# Altium PCB LimeSDR-Mini_2v5_Rounded.PcbDoc (part 4 of 7)
Units mm, origin at the board's own origin, x right, y up, seen from the top; angles counter-clockwise.
Board outline 69 x 31.37 mm, 8 copper layers (Top, L2, L3, L4, L5, L6, L7, Bottom), stack 1.555 mm thick; 439 components, 294 nets, 1986 pads, 831 vias.
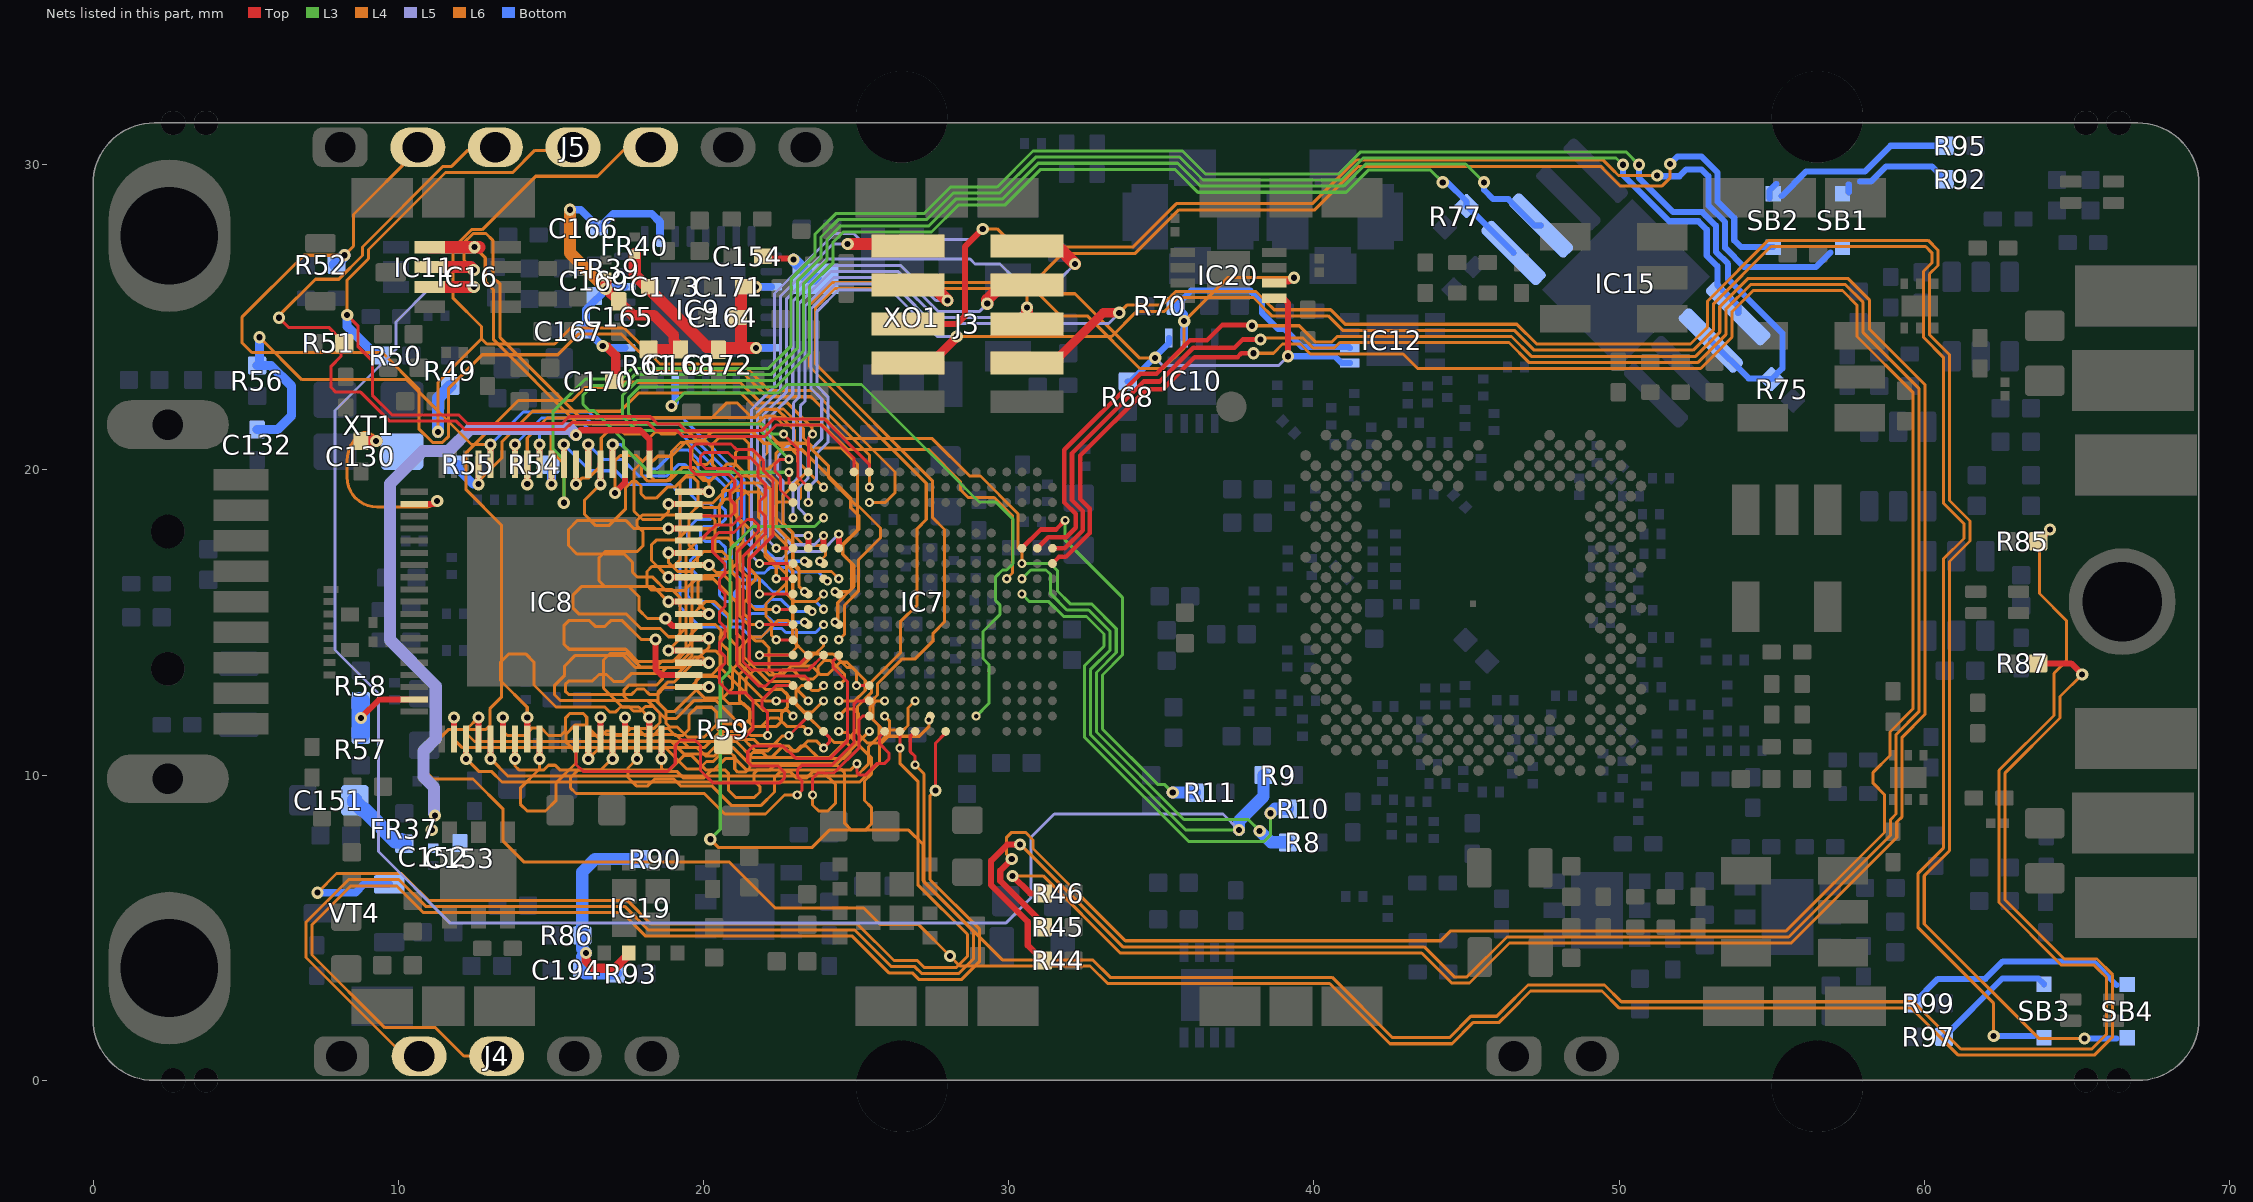
[diagram p9: the nets of this part, all layers, seen from the top]

## Part data (continued)
SB1 SB2 SB3 SB4: library part SOLDER_BRIDGE_TRIANGULAR, "Can be shorted out using solder paste or 0402-1206 resistor", Manufacturer=Yageo, Manufacturer Part Number 1=RC0402JR-070RL, Operating Temperature="-55°C ~ 155°C", Package / Case="0402 (1005 Metric)", Power (Watts)="0.063W, 1/16W", Resistance (Ohms)=0.0, Supplier Device Package=0402, Supplier Part Number 1=311-0.0JRTR-ND, Temperature Coefficient=-, Tolerance=Jumper, Category=Resistors, Composition="Thick Film", Features="Moisture Resistant", Height="0.016\" (0.40mm)", Number of Terminations=2, Packaging="Tape & Reel (TR)", Part Description="RES SMD 0.0OHM JUMPER 1/16W 0402", RoHS="RoHS Compliant", Size / Dimension="0.039\" L x 0.020\" W (1.00mm x 0.50mm)", Supplier 1=Digi-Key
T1 T2 T3 T4: library part TC1-1-13M+, Manufacturer=Minicircuits, Manufacturer Part Number 1=TC1-1-13M-45+, Part Description="RF balun; 1:1 ratio; 3 dB bandwidth: 0.3 MHz to 3.5 GHz; 3.8mm x 3.8mm", Supplier 1=Minicircuits, Supplier Part Number 1=TC1-1-13M-45+
VT1 VT2 VT3: library part ZVN4525E6_NMOS, Case/Package=SOT-23, Continuous Drain Current (ID)=230mA, Drain-source On Resistance-Max=8.5R, Drain to Source Breakdown Voltage=250V, Drain to Source Resistance=9.5R, Gate to Source Voltage (Vgs)=40V, Input Capacitance=72pF, Manufacturer="Diodes Zetex", Max Operating Temperature=150°C, Max Power Dissipation=1.1W, Min Operating Temperature=-55°C, Package Quantity=3000, Supplier Part Number 1=31-ZVN4525E6TACT-ND, Threshold Voltage=1.4V, ComponentLink1Description=https://datasheet.ciiva.com/935/zvn4525e6-935664.pdf?src-supplier=Digi-Key, ComponentLink1URL=https://datasheet.ciiva.com/935/zvn4525e6-935664.pdf?src-supplier=Digi-Key, ComponentLink2Description=https://datasheet.ciiva.com/25625/0900766b8104e683-25625123.pdf?src-supplier=RSComponents, ComponentLink2URL=https://datasheet.ciiva.com/25625/0900766b8104e683-25625123.pdf?src-supplier=RSComponents, ComponentLink3Description=https://datasheet.ciiva.com/16504/zvn4525e6-16504983.pdf?src-supplier=Future+Electronics, ComponentLink3URL=https://datasheet.ciiva.com/16504/zvn4525e6-16504983.pdf?src-supplier=Future+Electronics, Current Rating=230mA, Drain to Source Voltage (Vdss)=250V, Element Configuration=Single, Fall Time=1.7ns, Height=1.3mm, Lead Free="Lead Free", Length=3.1mm, Manufacturer Part Number 1=ZVN4525E6TA, Mount="Surface Mount", Nominal Vgs=1.4V, Number of Channels=1, Number of Elements=1, Number of Pins=6, On-State Resistance=8.5R, Packaging="Tape and Reel", Part Description="N-Channel 250 V 230mA (Ta) 1.1W (Ta) Surface Mount SOT-23-6", Polarity=N-CHANNEL, Power Dissipation=1.1W, Pricing 1="1=0,91000, 10=0,81200, 100=0,63300, 500=0,52292, 1000=0,41283 (USD)", Radiation Hardening=No, Rds On Max=8.5R, REACH SVHC="No SVHC", Rise Time=1.7ns, RoHS=Yes, RoHS Compliant=Yes, Series=-, Stock 1=1399, Supplier 1=Digi-Key, Turn-Off Delay Time=11.4ns, Turn-On Delay Time=1.25ns, Voltage Rating (DC)=250V, Weight=0.000529oz, Width=1.8mm
  VT1 VT2: Assembly Info=NF
VT4: library part NDS331N, "NDS331N", Current - Continuous Drain (Id) @ 25°C="6.3A (Ta)", Drive Voltage (Max Rds On,  Min Rds On)="2.5V, 4.5V", Input Capacitance (Ciss) (Max) @ Vds="700pF @ 16V", Manufacturer="Infineon Technologies", Operating Temperature="-55°C ~ 150°C (TJ)", Package / Case="TO-236-3, SC-59, SOT-23-3", Power Dissipation (Max)="1.3W (Ta)", Supplier Device Package=Micro3™/SOT-23, Supplier Part Number 1=IRLML6244TRPBFTR-ND, Category="Discrete Semiconductor Products", ComponentLink1Description=https://www.infineon.com/dgdl/irlml6244pbf.pdf?fileId=5546d462533600a4015356686fed261f, ComponentLink1URL=https://www.infineon.com/dgdl/irlml6244pbf.pdf?fileId=5546d462533600a4015356686fed261f, FET Feature=-, FET Type=N-Channel, Gate Charge (Qg) (Max) @ Vgs="8.9nC @ 4.5V", Manufacturer Part Number 1=IRLML6244TRPBF, Mounting Type="Surface Mount", Packaging="Tape & Reel (TR)", Part Description="N-Channel 20V 6.3A (Ta) 1.3W (Ta) Surface Mount Micro3™/SOT-23", Part Status=Active, Pricing 1="3000=0.09979 (USD)", Rds On (Max) @ Id, Vgs="21 mOhm @ 6.3A, 4.5V", RoHS="RoHS Compliant", Stock 1=21000, Supplier 1=Digi-Key, Technology="MOSFET (Metal Oxide)", Vgs (Max)=±12V, Vgs(th) (Max) @ Id="1.1V @ 10µA"
XO1: library part T604-040.0M_VCTCXO_ConnorWinfield, Case/Package=SMD/SMT, Frequency=40MHz, Frequency Stability=0.28ppm, Load Capacitance=15pF, Manufacturer=Connor-Winfield, Max Operating Temperature=85°C, Max Supply Current=6mA, Max Supply Voltage=3.465V, Min Operating Temperature=-40°C, Min Supply Voltage=3.135V, Nominal Supply Voltage (DC)=3.3V, Supplier Part Number 1=CW776CT-ND, ComponentLink1Description=https://datasheet.octopart.com:443/T604-040.0M-Connor-Winfield-datasheet-180230288.pdf?src-supplier=IHS, ComponentLink1URL=https://datasheet.octopart.com:443/T604-040.0M-Connor-Winfield-datasheet-180230288.pdf?src-supplier=IHS, Fall Time=8ns, Height=2.3876mm, Introduction Date=2008-05-23, Length=7.0104mm, Lifecycle Status=Production, Manufacturer Part Number 1=T604-040.0M, Mount="Surface Mount", Number of Pins=10, Number of Terminals=10, Output Type=LVCMOS, Packaging="Cut Tape (CT)", Part Description="40 MHz VCTCXO LVCMOS Oscillator 3.3V Enable/Disable 10-SMD, No Lead", Pricing 1="1=30,65, 10=27,54 (USD)", REACH SVHC=Unaffected, Rise Time=8ns, RoHS=Compliant, Stock 1=73, Supplier 1=DigiKey, Width=5.0038mm
XT1: library part CRYSTAL_19M2, "Oscillator Crystal 25 MHz", ESR (Equivalent Series Resistance)="50 Ohm", Frequency Stability=±20ppm, Frequency Tolerance=±10ppm, Load Capacitance=8pF, Manufacturer="AVX Corp/Kyocera Corp", Manufacturer Part Number 1=CX3225SB30000D0FPLCC, Operating Mode=Fundamental, Operating Temperature="-40°C ~ 85°C", Package / Case="4-SMD, No Lead (DFN, LCC)", Ratings=-, Supplier Part Number 1=1253-1368-1-ND, Category="Crystals and Oscillators", Frequency=30MHz, Height="0.024\" (0.60mm)", Mounting Type="Surface Mount", Packaging="Cut Tape (CT)", Part Description="30MHz ±10ppm Crystal 8pF 50 Ohm -40°C ~ 85°C Surface Mount 4-SMD, No Lead (DFN, LCC)", RoHS="RoHS Compliant", Size / Dimension="0.126\" L x 0.098\" W (3.20mm x 2.50mm)", Supplier 1=Digi-Key, Type="MHz Crystal"

## Free pads (board coordinates)
  round 0.8 hole 0.8 unplated mask+0.05: 0(2.625,31.37) 0(2.625,0) 0(3.7,31.37) 0(3.7,0) 0(65.3,0) 0(65.3,31.37) 0(66.375,0) 0(66.375,31.37)
  round 3 hole 3 unplated mask+0.05: 0(26.5,-0.2) 0(26.5,31.57) 0(56.5,-0.2) 0(56.5,31.57)
  oval 4x5 hole 3.2 slot 4.3 at 90 deg mask+0.05: 2(2.5,3.68) 2(2.5,27.68)
  round 3.5 hole 2.6 mask+0.05: 2(66.486,15.685)

## Via types
v1: diameter 0.4, hole 0.2, Top to Bottom, tented both sides, 554 vias
v2: diameter 0.3, hole 0.15, Top to Bottom, tented both sides, 160 vias
v3: diameter 0.35, hole 0.2, Top to Bottom, tented both sides, 88 vias
v4: diameter 0.5, hole 0.2, Top to Bottom, tented bottom, 25 vias
v5: diameter 0.5, hole 0.2, Top to Bottom, tented both sides, 4 vias

## Nets (pads, with @x,y where several pads share a name; then routed paths per layer and width w, separated by ;. In a path a pad name is that pad's centre, name@x,y a point inside that pad or via, vN(x,y) a via of type N, cw(c..) or ccw(c..) an arc to the next point about the centre after c; other vN are vias at no path point)
+1.8V_DIG_LMK: C164.2 C171.2 C172.2 C173.2 FR40.2 IC9.19 IC9.23 | length 9.2
  Top w0.4: FR40.2@17.75,27.07 17.75,26.395 18.172,25.972 20.105,24.04 20.44,24.04 20.49,23.99 C172.2@20.49,23.95 ; C172.2@20.49,23.94 C172.2@20.49,23.95 ; v1(21.725,24) 21.26,24 ; v1(21.725,26) C171.2@21.325,26 21.225,25.9 21.225,25 21.225,24.035 21.26,24 ; C172.2@20.49,23.95 20.54,24 21.26,24
  Bottom w0.25: v1(21.725,24) IC9.23@22.225,24 ; v1(21.725,26) IC9.19@22.225,26
+3.3V_DIG_LMK: C165.2 C166.2 C167.2 C168.2 C169.2 C170.2 FR39.2 IC9.2 IC9.6 IC9.10 R61.1 | length 17
  Top w0.3: v1(16.7,24.06) 16.719,24.041 16.831,24.041 17.125,23.746 C170.2@17.125,22.9
  Top w0.35: FR39.2@16.808,26.217 16.808,25.942 C165.2@17.225,25.525 17.675,25.075 18.372,25.075 19.022,24.425 19.022,24.228 19.25,24 C168.2@19.25,23.95 R61.1@18.2,23.95
  L6 w0.4: v1(15.625,28.525) 15.625,27.11 v1(16.8,25.935)
  Bottom w0.25: v1(15.625,28.525) 15.975,28.525 16.4,28.1 16.4,28.05 16.525,27.925 C166.2@16.575,27.925 16.625,27.925 16.75,28.05 16.75,28.1 17.05,28.4 18.3,28.4 18.575,28.125 IC9.10@18.575,27.65 ; IC9.2@17.425,24 16.801,24 16.741,24.06 v1(16.7,24.06) 16.15,24.61 16.15,25.244 16.906,26 IC9.6@17.425,26
AVDD_FT: C151.2 C152.2 C153.1 FR37.2 IC8.2 | length 24.3
  Top w0.2: v1(15.825,21.15) 15.975,21.3 17.926,21.3 18.225,21.001 IC8.2@18.225,20.185
  L5 w0.4: v1@11.175,8.75 11.175,9.6 10.825,9.95 10.825,10.794 11.225,11.194 11.225,12.925 9.725,14.425 9.725,19.55 10.8,20.625 11.65,20.625 12.375,21.35 15.625,21.35 v1(15.825,21.15)
  Bottom w0.5: C151.2@8.575,9.175 8.575,9.125 8.825,8.875 8.875,8.875 9.9,7.85 10.1,7.85 FR37.2@10.2,7.75
  other v1: 11.1,8.2 11.2,8.675
BOM_VER0: IC7.N1 R44.2 | length 89.6
  Top w0.15: IC7.N1@31.435,17.435 31.84,17.435 32.424,18.019 32.424,18.656 32.075,19.005 32.075,20.554 34.421,22.9 34.946,22.9 36.046,24 37.4,24 37.675,24.275 v1(38.25,24.275)
  Top w0.2: v1(30.375,7.725) 29.95,7.725 29.425,7.2 29.425,6.4 30.625,5.2 30.625,4.425 R44.2@31.125,3.925
  L4 w0.1: v1@30.382,7.732 33.739,4.375 43.616,4.375 44.599,3.392 45.018,3.392 46.326,4.7 55.559,4.7 58.9,8.041 58.9,8.55 59.075,8.725 59.075,11.325 59.825,12.075 59.825,22.675 58,24.5 58,25.492 57.412,26.08 54.313,26.08 53.5,25.267 53.5,24.433 52.592,23.525 47.042,23.525 46.392,24.175 40.85,24.175 40.675,24 39.967,24 39.642,24.325 38.3,24.325 v1(38.25,24.275)
BOM_VER1: IC7.M1 R45.2 | length 87.8
  Top w0.15: IC7.M1@31.435,16.935 31.65,17.15 31.875,17.15 32.65,17.925 32.65,18.75 32.35,19.05 32.35,20.475 34.525,22.65 35.05,22.65 36.1,23.7 37.5,23.7 37.625,23.825 v1(38.025,23.825)
  Top w0.2: v1(30.1,7.25) 29.725,6.875 29.725,6.534 31.127,5.132 R45.2@31.127,5.02
  L4 w0.1: v1(30.1,7.25) 29.925,7.425 29.925,7.95 30.1,8.125 30.55,8.125 30.8,7.875 30.8,7.597 33.705,4.692 33.822,4.575 44.158,4.575 44.483,4.9 55.476,4.9 58.7,8.124 58.7,9.358 58.325,9.733 58.325,10.092 58.875,10.642 58.875,11.417 59.625,12.167 59.625,22.55 57.8,24.375 57.8,25.4 57.32,25.88 54.395,25.88 53.7,25.184 53.7,24.35 52.675,23.325 43.4,23.325 42.925,23.8 39.884,23.8 39.559,24.125 38.975,24.125 38.675,23.825 v1(38.025,23.825)
BOM_VER2: IC7.N2 R46.2 | length 87.1
  Top w0.15: IC7.N2@30.935,17.435 31.3,17.8 31.885,17.8 32.198,18.112 32.198,18.563 31.825,18.935 31.825,20.657 34.318,23.15 34.843,23.15 35.943,24.25 36.5,24.25 37,24.75 v1@37.975,24.75
  Top w0.2: v1(30.125,6.7) 30.7,6.125 R46.2@31.125,6.125
  L4 w0.1: v1(30.125,6.7) 31.131,6.7 33.656,4.175 43.533,4.175 44.516,3.192 45.101,3.192 46.409,4.5 55.642,4.5 59.1,7.958 59.1,8.467 59.275,8.642 59.275,11.242 60.025,11.992 60.025,22.792 58.2,24.617 58.2,25.575 57.495,26.28 54.23,26.28 53.3,25.35 53.3,24.516 52.509,23.725 47.125,23.725 46.475,24.375 40.767,24.375 40.592,24.2 40.05,24.2 39.525,24.725 v1(37.975,24.725)
CLK_SEL: IC7.B6 IC9.30 | length 21.4
  L3 w0.1: v1(18.95,22.1) 19.375,22.525 22.456,22.525 22.731,22.8 25.179,22.8 29.029,18.95 29.575,18.95 30.14,18.385 30.14,16.93 29.933,16.724 29.799,16.724 29.575,16.5 29.575,15.718 29.711,15.581 29.711,15.261 29.159,14.709 29.159,13.821 29.35,13.629 29.35,12.35 v2(28.935,11.935)
  Bottom w0.25: v1(18.95,22.1) 19.075,22.225 IC9.30@19.075,22.85
CLK_XO: C154.2 XO1.5 | length 2.1
  Top w0.2: C154.2@21.95,27 22.025,26.925 22.925,26.925 v1(22.95,26.9)
  Bottom w0.4: v1(22.95,26.9) 23.356,26.494 23.356,26.334 23.516,26.334 ccw(c23.67,26.487) XO1.5@23.67,26.27
EN_VCC3P3: C194.2 IC19.2 R86.1 R90.2 R93.1 | length 8.5
  Top w0.3: v1(16.15,4.175) 16.15,3.925 16.4,3.675 17.1,3.675 17.475,4.05 17.475,4.1 IC19.2@17.55,4.175
  Bottom w0.4: R93.1@17.125,3.5 16.118,3.5 16.025,3.593 16.025,4.05 v1(16.15,4.175) 16.025,4.3 R86.1@16.025,4.75 16.025,6.825 16.45,7.25 R90.2@17.925,7.25
FAN_CTRL: IC7.A11 VT4.G | length 33.7
  Top w0.1: v2(26.435,10.885) IC7.A11@26.435,11.435
  L6 w0.1: v1(7.35,6.15) 7.975,6.775 10.108,6.775 10.35,6.533 10.983,5.9 17.499,5.9 18.274,5.125 25.041,5.125 26.241,3.925 27.008,3.925 27.233,3.7 28.284,3.7 28.65,4.066 28.65,4.784 27.025,6.409 27.025,9.8 26.435,10.39 v2(26.435,10.885)
  Bottom w0.25: v1(7.35,6.15) 8.6,6.15 8.875,6.425 VT4.G@9.7,6.425
FPGA_CFG_SPI_MISO: IC7.T18 IC15.2 | length 45.3
  Top w0.1: v2(22.8,20.35) 22.5,20.35 22.35,20.2 22.35,19.95 22.524,19.776 22.524,19.346 IC7.T18@22.935,18.935
  L3 w0.1: v2(22.8,20.35) 21.85,21.3 17.8,21.3 17.35,21.75 17.35,22.445 17.83,22.925 22.291,22.925 23.275,23.909 23.275,26.1 24.05,26.875 24.05,27.553 24.497,28 27.391,28 28.266,28.875 29.791,28.875 30.966,30.05 35.533,30.05 36.283,29.3 40.975,29.3 41.7,30.025 44.975,30.025 v1(45.575,29.425)
  Bottom w0.2: v1(45.575,29.425) 45.575,29.175 45.875,28.875 46.369,28.875 47.234,28.009 IC15.2@47.443,28.009
FPGA_CFG_SPI_MOSI: IC7.U18 IC15.5 | length 55.3
  Top w0.1: v2(22.8,19.925) 22.8,19.57 IC7.U18@22.935,19.435
  L3 w0.1: v2(22.8,19.925) 18.225,19.925 17.375,20.775 17.375,20.98 16.405,21.95 16.255,21.95 16.05,22.155 16.05,22.45 16.375,22.775 17.397,22.775 17.747,23.125 22.208,23.125 23.075,23.992 23.075,26.183 23.85,26.958 23.85,27.636 24.414,28.2 27.308,28.2 28.183,29.075 29.708,29.075 30.883,30.25 35.616,30.25 36.366,29.5 40.892,29.5 41.617,30.225 49.9,30.225 v1(50.125,30)
  Bottom w0.2: v1(50.125,30) 50.125,29.676 51.651,28.15 52.602,28.15 52.875,27.877 52.875,27.026 53.225,26.676 53.225,26.05 53.905,25.37 IC15.5@53.905,25.139
FPGA_CFG_SPI_SCLK: IC7.U16 IC15.6 R75.1 | length 69.3
  L3 w0.1: v1(15.425,18.925) 15.425,20.34 15.075,20.69 15.075,21.925 16.125,22.975 17.314,22.975 17.664,23.325 22.125,23.325 22.875,24.075 22.875,26.266 23.65,27.041 23.65,27.718 24.332,28.4 27.225,28.4 28.1,29.275 29.625,29.275 30.8,30.45 35.699,30.45 36.449,29.7 40.809,29.7 41.534,30.425 50.225,30.425 v1(50.65,30)
  L6 w0.1: v1(15.425,18.925) 15.425,20.225 15,20.65 15,21.125 15.375,21.5 21.825,21.5 22.55,20.775 22.8,20.775 23.076,20.499 23.076,20.294 v2(23.935,19.435)
  Bottom w0.2: v1(50.65,30) 50.65,29.575 51.775,28.45 52.726,28.45 53.175,28.001 53.175,27.151 53.575,26.751 53.575,26.25 55.35,24.475 55.35,23.332 R75.1@54.996,22.979 54.714,22.979 54.692,23 54.248,23 IC15.6@53.007,24.241
FPGA_CFG_SPI_SS: IC7.U17 IC15.1 R77.1 | length 43.5
  Top w0.1: v2(22.625,21.175) 23.1,20.7 23.1,19.77 IC7.U17@23.435,19.435
  L3 w0.1: v2(22.625,21.175) 22.258,21.175 21.933,21.5 17.883,21.5 17.55,21.833 17.55,22.362 17.913,22.725 22.374,22.725 23.475,23.826 23.475,26.017 24.25,26.792 24.25,27.47 24.58,27.8 27.474,27.8 28.349,28.675 29.874,28.675 31.049,29.85 35.45,29.85 36.2,29.1 41.058,29.1 41.783,29.825 43.825,29.825 v1(44.225,29.425)
  Bottom w0.2: v1(44.225,29.425) 44.375,29.425 45.003,28.797 R77.1@45.004,28.654 IC15.1@46.545,27.111
FPGA_EGPIO0: IC7.A10 J4.2 | length 38.5
  Top w0.1: v2(26.935,10.335) 26.935,10.61 26.775,10.77 26.775,11.275 IC7.A10@26.935,11.435
  L6 w0.1: J4.2@10.682,0.795 10.205,0.795 6.975,4.025 6.975,5.183 8.367,6.575 10.025,6.575 10.9,5.7 17.416,5.7 18.191,4.925 24.958,4.925 26.158,3.725 26.925,3.725 27.15,3.5 28.367,3.5 28.85,3.983 28.85,4.867 27.225,6.492 27.225,10.045 v2(26.935,10.335)
FPGA_EGPIO1: IC7.A8 J4.3 | length 40.8
  Top w0.1: v1(27.6,9.5) 27.6,11.05 27.935,11.385 IC7.A8@27.935,11.435
  L6 w0.1: J4.3@13.225,0.795 12.147,0.795 11.217,1.725 9.558,1.725 7.175,4.108 7.175,5.1 8.45,6.375 9.942,6.375 10.817,5.5 17.333,5.5 18.108,4.725 24.875,4.725 26.075,3.525 26.842,3.525 27.067,3.3 28.45,3.3 29.05,3.9 29.05,4.95 27.425,6.575 27.425,9.325 v1(27.6,9.5)
FPGA_GPIO0: IC7.N15 J3.1 | length 17
  Top w0.2: IC7.N15@24.435,17.435 v2(24.435,17.9)
  Top w0.4: v1(24.725,27.4) 26.56,27.4 J3.1@26.7,27.26
  L5 w0.1: v2(24.435,17.9) 23.86,17.325 22.8,17.325 22.575,17.1 22.2,17.1 21.925,17.375 21.925,19.375 21.775,19.525 21.775,21.9 21.925,22.05 22.525,22.65 22.525,25.697 24.228,27.4 v1@24.675,27.4
FPGA_GPIO1: IC7.N18 J3.2 | length 21.5
  Top w0.1: v2(22.385,17.435) IC7.N18@22.935,17.435
  Top w0.4: J3.2@30.6,27.335 31.59,27.335 v1(32.175,26.75)
  L5 w0.1: v2(22.385,17.435) 22.15,17.67 22.15,19.475 21.975,19.65 21.975,21.817 22.008,21.85 22.725,22.567 22.725,25.614 24.021,26.91 28.74,26.91 28.9,26.75 29.719,26.75 30.169,26.3 31.725,26.3 v1(32.175,26.75)
FPGA_GPIO2: IC7.N16 J3.3 | length 17.7
  Top w0.2: IC7.N16@23.935,17.435 v2(23.935,17.85)
  Top w0.4: J3.3@26.7,26.06 27.49,26.06 v1(28,25.55)
  L5 w0.1: v2(23.935,17.85) 23.635,17.55 22.875,17.55 22.375,18.05 22.375,19.55 22.175,19.75 22.175,21.734 22.925,22.484 22.925,25.531 24.094,26.7 26.466,26.7 27.616,25.55 v1(28,25.55)
FPGA_GPIO3: IC7.N17 J3.4 | length 17.9
  Top w0.2: IC7.N17@23.435,17.435 v2(23.435,17.85) v2@23.435,17.9
  Top w0.4: v1(29.3,25.45) 29.3,25.575 29.785,26.06 J3.4@30.6,26.06
  L5 w0.1: v2(23.435,17.85) 23,17.85 22.6,18.25 22.6,19.65 22.425,19.825 22.425,20.45 22.95,20.975 22.95,22.2 23.125,22.375 23.125,22.401 23.125,25.449 24.176,26.5 26.383,26.5 26.665,26.218 27.683,25.2 29.05,25.2 v1(29.3,25.45)
FPGA_GPIO4: IC7.M18 J3.5 SB1.2 | length 55.4
  Top w0.1: v2(21.835,16.935) IC7.M18@22.935,16.935
  Top w0.2: J3.5@26.7,24.785 28.31,24.785 28.575,25.05 28.575,27.325 v1(29.15,27.9)
  L4 w0.1: v1(29.15,27.9) 29.625,27.9 30.225,27.3 34.067,27.3 35.492,28.725 39.95,28.725 41.375,30.15 49.483,30.15 49.775,29.858 49.775,29.855 49.98,29.65 v1(51.25,29.65)
  L5 w0.1: v2(21.835,16.935) 21.575,17.195 21.575,21.983 21.842,22.25 22.325,22.733 22.325,25.78 24.295,27.75 24.925,27.75 25.125,27.55 28.8,27.55 v1(29.15,27.9)
  Bottom w0.2: v1(51.25,29.65) 51.275,29.625 51.975,29.625 52.2,29.85 52.701,29.85 52.925,29.626 52.925,28.676 53.475,28.126 53.475,27.275 54.1,26.65 56.45,26.65 56.925,27.125
FPGA_GPIO5: IC7.R18 J3.6 SB2.2 | length 45.8
  Top w0.4: J3.6@30.6,24.785 v1(30.6,25.325)
  L4 w0.1: v1(30.6,25.325) 30.6,25.925 31.775,27.1 34.15,27.1 35.575,28.525 40.033,28.525 41.458,29.95 49.4,29.95 49.575,29.775 49.575,29.772 50.047,29.3 51.395,29.3 51.675,29.58 v1(51.675,30.025)
  L5 w0.1: v2(22.935,18.435) 22.935,19.585 23.175,19.825 23.175,22.1 23.325,22.25 23.325,25.366 24.259,26.3 26.3,26.3 26.465,26.135 27.6,25 30.275,25 v1(30.6,25.325)
  Bottom w0.2: v1(51.675,30.025) 51.925,30.275 52.7,30.275 53.225,29.75 53.225,28.8 53.775,28.25 53.775,27.525 54,27.3 SB2.2@55.05,27.3
FPGA_GPIO6: IC7.T17 J3.7 SB3.2 | length 78.6
  Top w0.3: J3.7@26.7,23.51 27.46,23.51 28.3,24.35 v1(28.3,24.375)
  L4 w0.1: v1(28.3,24.375) 33.375,24.375 34.2,25.2 35.108,25.2 35.558,25.65 38.02,25.65 38.25,25.42 38.25,25.417 38.617,25.05 40.467,25.05 40.942,24.575 46.567,24.575 47.217,23.925 52.426,23.925 53.1,24.599 53.1,25.45 54.975,27.325 60.045,27.325 60.25,27.12 60.25,26.783 59.975,26.508 59.975,24.345 60.625,23.695 60.625,18.917 61.3,18.242 61.3,17.758 60.625,17.083 60.625,7.608 59.8,6.783 59.8,5 62.275,2.525 v1(62.275,1.45)
  L5 w0.1: v2(23.435,18.935) 23.435,19.41 23.7,19.675 23.7,20.525 24.075,20.9 24.075,22.4 23.725,22.75 23.725,25.2 24.425,25.9 26.125,25.9 27.65,24.375 v1(28.3,24.375)
  Bottom w0.2: v1(62.275,1.45) 63.6,1.45
FPGA_GPIO7: IC7.R17 J3.8 SB4.2 | length 83.4
  Top w0.3: J3.8@30.6,23.51 31.46,23.51 33.1,25.15 v1(33.625,25.15)
  L4 w0.1: v1(33.625,25.15) 33.887,25.412 35.037,25.412 35.475,25.85 38.103,25.85 38.45,25.503 38.45,25.5 38.7,25.25 40.55,25.25 41.025,24.775 46.65,24.775 47.3,24.125 52.344,24.125 52.9,24.681 52.9,25.533 54.892,27.525 60.128,27.525 60.45,27.203 60.45,26.7 60.175,26.425 60.175,24.428 60.825,23.778 60.825,19 61.5,18.325 61.5,17.675 60.825,17 60.825,7.525 60,6.7 60,5.125 63.75,1.375 v1(65.25,1.375)
  L5 w0.1: v2(23.435,18.435) 23.111,18.759 23.111,19.411 23.425,19.725 23.425,20.575 23.875,21.025 23.875,22.317 23.525,22.667 23.525,25.283 24.342,26.1 26.217,26.1 26.382,25.935 27.517,24.8 33.275,24.8 v1(33.625,25.15)
  Bottom w0.2: v1(65.25,1.375) 66.3,1.375
FPGA_I2C_SCL: IC7.C10 IC10.2 IC12.6 IC20.6 R70.2 | length 46.3
  Top w0.2: IC20.6@38.7,26.125 38.75,26.175 39.171,26.175 39.296,26.3 v1(39.35,26.3)
  L6 w0.1: v2(26.935,12.435) 26.7,12.2 26.7,11.625 26.55,11.475 25.9,11.475 25.55,11.825 25.55,12.475 25.7,12.625 25.7,13 26.5,13.8 26.925,13.8 27.525,14.4 27.525,14.65 27.9,15.025 27.9,18.05 27.5,18.45 27.5,19.65 23.675,23.475 23.675,25.325 24.3,25.95 30.8,25.95 31.7,25.05 32.575,25.05 34.3,23.325 35.075,23.325 35.75,24 v1(35.75,24.875) 37.175,26.3 v1(39.35,26.3)
  Bottom w0.2: R70.2@35.475,25.375 35.975,25.875 37.894,25.875 37.923,25.875 38.3,25.498 38.3,25.146 38.821,24.625 39.025,24.625 39.625,24.025 41.15,24.025 IC12.6@41.175,24
  Bottom w0.25: R70.2@35.475,25.375 35.75,25.1 v1(35.75,24.875) IC10.2@35.75,24.325
FPGA_I2C_SDA: IC7.B9 IC10.1 IC12.5 IC20.5 R68.2 | length 43.4
  Top w0.2: IC20.5@38.475,25.625 IC20.5@38.7,25.625 39,25.625 39.15,25.475 v1(39.15,23.725)
  L5 w0.1: v1(34.8,23.675) 35.05,23.425 38.85,23.425 v1(39.15,23.725)
  L6 w0.1: v2(27.385,11.81) 27.385,11.585 27.075,11.275 25.975,11.275 25.75,11.05 25.375,11.05 25.05,11.375 25.05,12.25 25.5,12.7 25.5,13.05 26.45,14 26.45,15.025 27.002,15.577 27.002,18.077 27.3,18.375 27.3,19.567 23.475,23.392 23.475,25.408 24.217,26.15 30.9,26.15 31.275,25.775 32.175,25.775 34.275,23.675 v1(34.8,23.675)
  Bottom w0.2: R68.2@33.9,22.9 34,22.9 v1@34.775,23.675 ; v1(34.8,23.675) v1@34.775,23.675 ; IC10.1@35.25,24.325 35.25,24.15 v1@34.775,23.675 ; v1(39.15,23.725) 40.692,23.725 40.917,23.5 IC12.5@41.175,23.5
FPGA_JTAG_TCK: IC7.U13 J5.2 R52.1 | length 37.7
  L6 w0.1: J5.2@10.639,30.475 8.535,28.371 8.535,27.335 v1(8.235,27.035) 6.91,27.035 4.875,25 4.875,24.175 5.2,23.85 9.475,23.85 10.675,22.65 10.675,21.35 11.125,20.9 11.445,20.9 11.65,21.105 11.65,22.675 12.75,23.775 15.225,23.775 15.9,24.45 17.317,24.45 18.492,23.275 21.2,23.275 22.075,22.4 23.525,22.4 25.435,20.49 v2(25.435,19.435)
  Bottom w0.4: R52.1@7.925,26.725 v1(8.235,27.035)
FPGA_JTAG_TDI: IC7.T13 J5.5 R49.2 | length 33.9
  L6 w0.1: v1(11.3,21.25) 11.3,22.875 12.725,24.3 ; J5.5@18.268,30.475 17.38,30.475 16.53,29.625 14.5,29.625 12.75,27.875 12.4,27.875 11.8,27.275 11.8,25.625 12.725,24.7 12.725,24.3 ; v2(25.435,18.935) 25.96,18.935 26.275,19.25 26.275,19.933 23.608,22.6 22.158,22.6 21.283,23.475 18.575,23.475 17.4,24.65 15.65,24.65 15.125,24.125 12.9,24.125 12.725,24.3
  Bottom w0.4: v1(11.3,21.25) 11.3,22.35 R49.2@11.7,22.75
FPGA_JTAG_TDO: IC7.V14 J5.3 R51.2 | length 32.7
  Top w0.1: v1(6.088,24.987) 6.4,24.675 7.725,24.675 8.125,24.275 8.125,23.725 7.8,23.4 7.8,22.7 7.95,22.55 8.767,22.55 9.717,21.6 11.9,21.6 12.175,21.325 15.458,21.325 15.683,21.55 18.175,21.55 18.425,21.3 19.125,21.3 19.325,21.1 22.008,21.1 22.383,21.475 23.85,21.475 24.935,20.39 IC7.V14@24.935,19.935
  L6 w0.1: v1(6.088,24.987) 6.088,25.052 7.285,26.25 8.05,26.25 8.825,27.025 8.825,27.308 11.467,29.95 11.75,29.95 12.275,30.475 J5.3@13.182,30.475
FPGA_JTAG_TMS: IC7.V13 J5.4 R50.2 | length 33.3
  Top w0.1: v1(8.325,25.075) 8.675,24.725 8.675,24.05 9.15,23.575 9.15,22.45 9.8,21.8 11.983,21.8 12.258,21.525 15.375,21.525 15.6,21.75 18.258,21.75 18.508,21.5 19.208,21.5 19.408,21.3 21.925,21.3 22.3,21.675 23.95,21.675 25.435,20.19 IC7.V13@25.435,19.935
  L6 w0.1: v1(8.325,25.075) 8.325,26.225 9.025,26.925 9.025,27.225 11.55,29.75 13.75,29.75 14.475,30.475 J5.4@15.725,30.475
  Bottom w0.3: v1(8.325,25.075) 8.325,24.7 9.205,23.82 R50.2@9.425,23.82
FPGA_LED1_G: IC7.R16 R85.2 | length 85.3
  Top w0.2: R85.2@63.733,17.66 v1(64.125,18.052)
  L3 w0.1: v1(20.225,7.9) 20.55,8.225 20.55,13.094 20.875,13.419 20.875,17.4 21.62,18.145 23.645,18.145 v2(23.935,18.435)
  L4 w0.1: v1(20.225,7.9) 20.5,7.625 23.55,7.625 24.125,8.2 26.725,8.2 27.2,7.725 27.2,6.542 29.792,3.95 32.75,3.95 33.325,3.375 40.6,3.375 42.575,1.4 44.442,1.4 45.142,2.1 45.995,2.1 46.21,2.315 46.21,2.318 47.017,3.125 49.525,3.125 50.075,2.575 59.65,2.575 61.2,1.025 65.492,1.025 65.975,1.508 65.975,3.375 65.575,3.775 64.5,3.775 62.45,5.825 62.45,10.158 64.25,11.958 64.25,13.339 64.661,13.75 64.661,15.064 63.775,15.95 63.775,17.702 v1(64.125,18.052)
FPGA_LED1_R: IC7.V17 R87.2 | length 105.1
  Top w0.1: IC7.V17@23.435,19.935 23.435,21.035 v2(23.575,21.175)
  Top w0.2: R87.2@63.733,13.66 64.815,13.66 v1(65.175,13.3)
  L4 w0.1: v1(28.075,4.075) 28.4,3.75 32.667,3.75 33.242,3.175 40.517,3.175 42.492,1.2 44.525,1.2 45.225,1.9 46.078,1.9 46.41,2.232 46.41,2.235 47.1,2.925 49.442,2.925 49.992,2.375 59.567,2.375 61.117,0.825 65.575,0.825 66.175,1.425 66.175,3.458 65.658,3.975 64.583,3.975 62.65,5.908 62.65,10.075 64.45,11.875 64.45,12.575 v1(65.175,13.3)
  L6 w0.1: v2(23.575,21.175) 23.563,21.187 23.563,21.387 22.75,22.2 21.875,22.2 21.2,22.875 17.15,22.875 16.975,22.7 16.125,22.7 15.7,22.275 13.933,22.275 12.225,20.567 12.225,19.35 13.375,18.2 13.375,12.55 13,12.175 13,11.625 12.875,11.5 11.65,11.5 10.925,10.775 10.925,10.1 11.15,9.875 12.45,9.875 13.437,8.888 13.437,7.838 14.125,7.15 20.85,7.15 22.35,5.65 25.25,5.65 25.8,5.1 27.05,5.1 v1(28.075,4.075)
FPGA_LED2_G: R92.2 SB1.1 | length 3.4
  Bottom w0.2: SB1.1@57.525,29.1 57.525,29.35 ; 57.9,29.45 58.25,29.45 58.75,29.95 60.25,29.95 R92.2@60.675,29.525
FPGA_LED2_R: R95.2 SB2.1 | length 6.6
  Bottom w0.2: SB2.1@54.925,28.9 54.925,29.15 55.15,29.375 ; 55.325,28.975 56.125,29.775 58.05,29.775 58.9,30.625 R95.2@60.675,30.625
FPGA_LED3_G: R97.2 SB3.1 | length 4.1
  Bottom w0.2: R97.2@60.65,1.425 62.563,3.338 63.737,3.338 SB3.1@63.925,3.15
FPGA_LED3_R: R99.2 SB4.1 | length 7.5
  Bottom w0.2: R99.2@59.65,2.525 60.45,3.325 62,3.325 62.575,3.9 65.525,3.9 66.3,3.125
FPGA_SPI_DAC_SS: IC7.L4 IC11.1 IC16.5 | length 27.5
  Top w0.4: IC16.5@11.025,27.3 v1(12.5,27.3) v1@12.65,27.3
  L4 w0.1: v1(12.5,27.3) 12.85,26.95 12.85,26.175 13.125,25.9 13.125,24.267 15.867,21.525 21.783,21.525 22.033,21.775 22.325,21.775 22.625,21.475 23.917,21.475 24.717,20.675 27.375,20.675 28.425,19.625 28.425,19.35 28.675,19.1 29.525,19.1 30.125,18.5 30.125,16.625 v2(29.935,16.435)
  Bottom w0.4: IC11.1@11.825,27.3 v1(12.5,27.3)
FPGA_SPI_LMS_SS: IC7.N3 R11.2 | length 13.6
  Top w0.15: IC7.N3@30.435,17.435 31.05,18.05 31.55,18.05 v2(31.85,18.35)
  L3 w0.1: v2(31.85,18.35) 31.85,17.7 33.725,15.825 33.725,13.934 33.075,13.284 33.075,11.508 34.883,9.7 35.103,9.7 v1(35.375,9.428)
  Bottom w0.4: v1(35.375,9.428) R11.2@36.1,9.428
FPGA_SPI_MISO: IC7.K3 R10.2 | length 15.8
  L3 w0.1: v2(30.435,15.935) 30.685,15.685 31.315,15.685 31.8,15.2 32.55,15.2 33.125,14.625 33.125,14.225 32.485,13.585 32.485,11.24 35.9,7.825 38.37,7.825 38.575,8.03 v1(38.575,8.753)
  Bottom w0.4: v1(38.575,8.753) 38.725,8.903 R10.2@39.15,8.903
FPGA_SPI_MOSI: IC7.L3 IC11.3 IC16.7 R9.2 | length 72.1
  Top w0.4: IC16.7@11.025,26 v1(12.475,26)
  L3 w0.1: v2(30.435,16.435) 30.725,16.725 31.225,16.725 31.375,16.575 31.375,15.943 31.905,15.413 32.619,15.413 33.325,14.708 33.325,14.1 32.675,13.45 32.675,11.333 35.808,8.2 v1(37.55,8.2)
  L5 w0.1: v1(12.475,26) 11.075,26 9.925,24.85 9.925,23.95 7.925,21.95 7.925,14.1 9.35,12.675 9.35,7.5 11.7,5.15 29.9,5.15 30.725,5.975 30.725,7.955 31.495,8.725 37.025,8.725 v1(37.55,8.2)
  Bottom w0.4: IC11.3@11.825,26 v1(12.475,26) ; v1(37.55,8.2) 37.55,8.5 38.35,9.3 R9.2@38.35,10.003
FPGA_SPI_SCLK: IC7.M3 IC11.2 IC16.6 R8.2 | length 44.7
  Top w0.4: IC16.6@11.025,26.65 12.375,26.65 v1(12.475,26.55)
  L3 w0.1: v2(30.435,16.935) 31.365,16.935 31.6,16.7 31.6,16.032 32.018,15.613 32.712,15.613 33.525,14.8 33.525,14.017 32.875,13.367 32.875,11.416 35.741,8.55 37.85,8.55 v1(38.225,8.175)
  L4 w0.1: v1(12.475,26.55) 12.15,26.875 12.15,27.445 12.455,27.75 12.875,27.75 13.1,27.525 13.1,26.325 13.338,26.087 13.338,24.337 15.95,21.725 21.7,21.725 21.95,21.975 22.425,21.975 22.725,21.675 24,21.675 24.65,21.025 27.5,21.025 28.725,19.8 29.074,19.8 30.301,18.573 30.301,17.442 30.435,17.308 v2(30.435,16.935)
  Bottom w0.4: IC11.2@11.825,26.65 12.375,26.65 v1(12.475,26.55) ; v1(38.225,8.175) 38.597,7.803 R8.2@39.15,7.803
FT_BE0: IC7.L15 IC8.4 | length 15.7
  Top w0.2: v1(17.1,19.25) 17.425,19.575 IC8.4@17.425,20.185
  L6 w0.1: v1(17.1,19.25) 17.1,20.3 17.275,20.475 17.8,20.475 17.975,20.3 17.975,19.835 18.175,19.635 18.785,19.635 18.95,19.8 18.95,20.6 19.25,20.9 19.425,20.9 19.625,20.7 19.625,20.375 19.825,20.175 20.1,20.175 20.3,20.375 20.3,20.85 20.5,21.05 21.3,21.05 21.5,20.85 21.5,20.025 22.05,19.475 22.05,18.475 22.925,17.6 22.925,16.9 23.15,16.675 24.195,16.675 v2(24.435,16.435)
FT_BE1: IC7.J17 IC8.5 | length 14.8
  Top w0.2: IC8.5@17.025,20.185 v1(17.025,20.835)
  Bottom w0.1: v1(17.025,20.835) 17.29,20.835 18.1,20.025 18.45,20.025 19.075,20.65 19.517,20.65 19.819,20.348 19.819,20.006 20.081,19.744 20.423,19.744 20.725,19.442 20.725,19.182 20.575,19.032 20.575,18.811 20.725,18.661 20.725,18.4 20.475,18.15 20,18.15 19.9,18.05 19.9,17.825 20.075,17.65 20.525,17.65 20.725,17.45 20.725,16.8 20.525,16.6 20.525,15.9 20.74,15.685 20.873,15.685 21.018,15.83 21.018,15.993 21.2,16.175 21.35,16.175 21.5,16.025 21.5,15.641 21.62,15.52 21.967,15.52 22.208,15.761 22.536,15.761 22.937,15.36 v2(23.56,15.36)
FT_BE2: IC7.K16 IC8.6 | length 15.4
  Top w0.2: v1(16.625,19.535) IC8.6@16.625,20.185
  L6 w0.1: v1(16.625,19.535) 16.1,19.01 16.1,18.55 16.475,18.175 16.9,18.175 17.45,18.725 17.45,19.425 17.65,19.625 17.8,19.625 17.95,19.475 17.95,19.225 18.1,19.075 18.45,19.075 18.81,19.435 19.06,19.435 19.5,19.875 19.775,19.875 20,19.65 20.225,19.65 20.775,20.2 21.042,20.2 21.8,19.442 21.8,18.45 22.725,17.525 22.725,15.934 22.974,15.685 23.685,15.685 v2(23.935,15.935)
FT_BE3: IC7.H17 IC8.7 | length 14.7
  Top w0.2: IC8.7@16.225,20.185 v1(16.225,20.835)
  Bottom w0.1: v1(16.225,20.835) 16.71,20.35 17.339,20.35 17.889,19.8 18.8,19.8 19.175,20.175 19.4,20.175 19.575,20 19.575,19.2 19.875,18.9 20.2,18.9 20.375,18.725 20.375,18.525 20.225,18.375 19.775,18.375 19.475,18.075 19.475,17.8 19.775,17.5 19.775,17.25 19.575,17.05 19.575,16.782 19.75,16.607 19.75,16.422 19.475,16.147 19.475,15.882 19.672,15.685 20.27,15.685 20.525,15.43 20.525,15.425 20.9,15.05 21.325,15.05 21.575,15.3 22,15.3 22.29,15.01 v2(23.31,15.01)
FT_CLK: IC7.D17 R59.1 | length 18.6
  Top w0.1: R59.1@20.65,11 20.9,11.25 21.375,11.25 21.625,11.5 21.625,12.45 21.375,12.7 20.85,12.7 20.529,13.021 20.529,13.485 20.7,13.656 20.7,13.894 20.529,14.065 20.529,14.354 20.7,14.525 20.7,14.85 20.529,15.021 20.529,15.354 20.7,15.525 20.7,15.95 20.529,16.121 20.529,16.429 20.7,16.6 20.7,16.925 20.3,17.325 20.3,17.75 20.5,17.95 21,17.95 21.425,18.375 21.625,18.375 21.8,18.2 21.8,18 21.1,17.3 21.1,13.625 21.8,12.925 22.05,12.925 22.375,13.25 23.325,13.25 23.435,13.14 IC7.D17@23.435,12.935
FT_D0: IC7.A13 IC8.40 | length 16
  Top w0.2: IC8.40@11.825,11.185 v1@11.825,11.835
  L4 w0.1: v1(11.825,11.885) 11.825,11.175 12.1,10.9 19.8,10.9 20.075,10.625 20.35,10.625 20.625,10.9 20.975,10.9 21.5,10.375 24.375,10.375 v2(25.435,11.435)
FT_D1: IC7.B12 IC8.41 | length 16.5
  Top w0.2: v1(12.225,10.535) IC8.41@12.225,11.185
  L4 w0.1: v1(12.225,10.535) 12.635,10.125 13.05,10.125 13.4,9.775 25.125,9.775 25.775,10.425 25.775,11 26.1,11.325 26.1,11.77 v2(25.935,11.935)
FT_D2: IC7.B15 IC8.42 | length 16.2
  Top w0.2: IC8.42@12.625,11.185 v1@12.625,11.835
  L4 w0.1: v1(12.625,11.885) 12.25,11.51 12.25,11.35 12.5,11.1 21.075,11.1 21.6,10.575 24.125,10.575 25.075,11.525 25.075,12.025 24.925,12.175 24.675,12.175 v2(24.435,11.935)
FT_D3: IC7.C12 IC8.43 | length 16.1
  Top w0.2: v1(13.025,10.535) IC8.43@13.025,11.185
  L4 w0.1: v1(13.025,10.535) 13.585,9.975 25.016,9.975 25.4,10.359 25.4,10.925 25.75,11.275 25.75,11.625 25.45,11.925 25.45,12.225 25.66,12.435 v2(25.935,12.435)
FT_D4: IC7.A16 IC8.44 | length 16.1
  Top w0.1: v2(23.935,10.885) 24.125,11.075 24.125,11.245 IC7.A16@23.935,11.435
  Top w0.2: IC8.44@13.425,11.185 v1@13.425,11.835
  L4 w0.1: v1(13.425,11.885) 13.425,11.45 13.575,11.3 14.135,11.3 14.385,11.55 14.675,11.55 14.925,11.3 15.325,11.3 15.485,11.46 15.485,11.885 15.625,12.025 16.05,12.025 16.175,11.9 16.175,11.475 16.35,11.3 16.662,11.3 16.812,11.45 16.987,11.45 17.137,11.3 17.375,11.3 17.6,11.525 17.85,11.525 18.075,11.3 18.35,11.3 18.585,11.535 18.84,11.535 19.075,11.3 19.325,11.3 19.525,11.5 19.525,11.975 19.775,12.225 20.275,12.225 20.45,12.05 20.45,11.525 20.675,11.3 21.2,11.3 21.7,10.8 22.11,10.8 22.314,11.004 22.521,11.004 22.725,10.8 23.1,10.8 23.425,11.125 23.695,11.125 v2(23.935,10.885)
FT_D5: IC7.A12 IC8.45 | length 15.7
  Top w0.1: v2(25.025,10.375) 25.025,10.1 25.125,10 25.3,10 25.675,10.375 25.925,10.375 26.075,10.525 26.075,10.725 25.775,11.025 25.775,11.275 IC7.A12@25.935,11.435
  Top w0.2: v1(13.825,10.535) IC8.45@13.825,11.185
  L4 w0.1: v1(13.825,10.535) 13.825,10.3 13.95,10.175 14.775,10.175 14.925,10.325 15.14,10.325 15.29,10.175 18.9,10.175 19.375,10.65 19.6,10.65 20.075,10.175 20.35,10.175 20.725,10.55 21.025,10.55 21.4,10.175 24.825,10.175 v2(25.025,10.375)
FT_D6: IC7.D18 IC8.46 | length 16.4
  Top w0.1: v2(22.1,11.3) 22.1,12.05 21.925,12.225 21.925,12.475 22.385,12.935 IC7.D18@22.935,12.935
  Top w0.2: IC8.46@14.225,11.185 v1@14.225,11.835
  L4 w0.1: v1(14.225,11.885) 14.225,12.225 13.35,13.1 13.35,13.7 13.625,13.975 14.175,13.975 14.45,13.7 14.45,12.955 15.17,12.235 15.97,12.235 16.77,12.235 16.94,12.065 17.11,12.065 17.28,12.235 17.57,12.235 17.702,12.102 17.948,12.102 18.095,12.25 18.355,12.25 18.755,11.85 19.1,11.85 19.7,12.45 20.4,12.45 21.55,11.3 v2(22.1,11.3)
FT_D7: IC7.B17 IC8.47 | length 15.5
  Top w0.1: v2(22.8,11.3) IC7.B17@23.435,11.935
  Top w0.2: v1(14.625,10.535) IC8.47@14.625,11.185
  L6 w0.1: v1(14.625,10.535) 14.625,10.2 14,9.575 14,9.05 14.225,8.825 14.825,8.825 15.175,9.175 15.175,9.75 15.825,10.4 15.825,10.75 15.5,11.075 15.5,11.35 15.8,11.65 16.125,11.65 16.65,11.125 18.925,11.125 19.35,10.7 20.15,10.7 20.625,11.175 21.65,11.175 21.825,11 22.3,11 22.588,11.288 22.788,11.288 v2(22.8,11.3)
FT_D8: IC7.F15 IC8.50 | length 18.4
  Top w0.1: IC8.50@15.825,11.185 15.825,10.35 16.05,10.125 18.825,10.125 19.075,10.375 19.075,10.975 19.25,11.15 19.725,11.15 19.9,10.975 19.9,10.15 20.3,9.75 22.5,9.75 22.65,9.9 22.65,10.1 22.45,10.3 21.6,10.3 21.45,10.45 21.45,10.775 21.625,10.95 22.625,10.95 23.025,10.55 24.15,10.55 24.725,11.125 24.725,13.055 24.25,13.53 24.25,13.75 IC7.F15@24.435,13.935
FT_D9: IC7.D16 IC8.51 | length 15.5
  Top w0.2: v1(16.225,10.535) IC8.51@16.225,11.185
  L6 w0.1: v1(16.225,10.535) 16.575,10.885 18.77,10.885 19.455,10.2 19.851,10.2 20.101,10.45 20.325,10.45 20.6,10.725 20.9,10.725 21.025,10.6 21.025,10.2 21.125,10.1 21.375,10.1 21.525,10.25 21.525,10.65 21.625,10.75 21.925,10.75 22.075,10.6 22.25,10.6 22.6,10.95 22.794,10.95 22.944,10.8 23.031,10.8 23.181,10.95 23.375,10.95 23.775,10.55 24.6,10.55 24.8,10.75 24.8,10.95 24.675,11.075 24.275,11.075 23.025,12.325 23.025,12.75 23.21,12.935 23.391,12.935 23.551,12.775 23.775,12.775 v2(23.935,12.935)
FT_D10: IC7.D15 IC8.52 | length 15.4
  Top w0.2: IC8.52@16.625,11.185 v1@16.625,11.835
  L6 w0.1: v1(16.625,11.885) 16.625,11.5 16.79,11.335 19.09,11.335 19.525,10.9 20.025,10.9 20.55,11.425 21.45,11.425 21.625,11.6 22.4,11.6 22.562,11.763 22.562,12.037 22.75,12.225 22.75,12.65 22.575,12.825 22.3,12.825 21.925,12.45 21.575,12.45 21.4,12.625 21.4,13.175 21.675,13.45 21.987,13.45 22.163,13.275 22.437,13.275 22.612,13.45 22.925,13.45 23.225,13.15 23.6,13.15 23.75,13.3 23.75,13.55 23.95,13.75 24.175,13.75 24.625,13.3 24.625,13.125 v2(24.435,12.935)
FT_D11: IC7.C13 IC8.53 | length 15.7
  Top w0.1: v2(23.075,9.35) 23.225,9.5 23.225,9.819 23.075,9.969 23.075,10.175 23.225,10.325 24.193,10.325 24.925,11.057 24.925,12.325 25.035,12.435 IC7.C13@25.435,12.435
  Top w0.2: v1(17.025,10.535) IC8.53@17.025,11.185
  L6 w0.1: v1(17.025,10.535) 17.003,10.535 16.643,10.175 15.9,10.175 15.65,9.925 15.65,9.575 15.825,9.4 20.025,9.4 20.7,8.725 22.03,8.725 22.655,9.35 v2(23.075,9.35)
FT_D12: IC7.H18 IC8.54 | length 15.3
  Top w0.1: v2(21.835,14.935) IC7.H18@22.935,14.935
  Top w0.2: IC8.54@17.425,11.185 v1@17.425,11.835
  L6 w0.1: v1(17.425,11.885) 17.425,11.675 17.565,11.535 18.385,11.535 18.575,11.725 18.575,11.901 18.575,12.03 18.155,12.45 17.525,12.45 17.4,12.575 17.4,12.8 17.55,12.95 18.458,12.95 18.65,13.142 18.65,13.388 18.797,13.535 19.243,13.535 19.625,13.917 19.625,16.95 20,17.325 20.625,17.325 20.94,17.01 20.94,16.635 21.185,16.39 21.185,15.215 21.465,14.935 v2(21.835,14.935)
FT_D13: IC7.B13 IC8.55 | length 15.6
  Top w0.1: v2@23.575,9.3 v2(23.575,9.35) 23.575,9.9 23.75,10.075 24.275,10.075 25.101,10.901 25.101,11.826 25.21,11.935 IC7.B13@25.435,11.935
  Top w0.2: v1(17.825,10.535) IC8.55@17.825,11.185
  L6 w0.1: v1(17.825,10.535) 17.525,10.235 17.525,9.925 17.8,9.65 18.175,9.65 18.4,9.875 19.025,9.875 19.25,9.65 20.275,9.65 20.925,9 21.875,9 22.325,9.45 22.325,9.925 22.5,10.1 22.856,10.1 23.056,9.9 23.369,9.9 23.569,10.1 23.925,10.1 24.325,9.7 24.325,9.075 24.075,8.825 23.775,8.825 23.575,9.025 v2(23.575,9.35)
FT_D14: IC7.J18 IC8.56 | length 15.4
  Top w0.1: v2(22.385,15.435) IC7.J18@22.935,15.435
  Top w0.2: IC8.56@18.225,11.185 v1@18.225,11.835
  L6 w0.1: v1(18.225,11.885) 17.875,12.235 17.34,12.235 16.725,12.85 16.725,13.771 16.939,13.985 17.49,13.985 17.925,13.55 18.45,13.55 18.635,13.735 19.11,13.735 19.425,14.05 19.425,17.3 19.9,17.775 20.8,17.775 21.2,17.375 21.2,16.725 21.448,16.477 21.448,15.677 21.69,15.435 v2(22.385,15.435)
FT_D15: IC7.A15 IC8.57 | length 15.6
  Top w0.2: v1(18.625,10.535) IC8.57@18.625,11.185
  L6 w0.1: v1(18.625,10.535) 18.625,10.225 18.725,10.125 19.125,10.125 19.35,9.9 19.996,9.9 20.271,10.175 20.7,10.175 20.825,10.05 20.825,9.5 21.05,9.275 21.675,9.275 21.85,9.45 21.85,9.625 21.65,9.825 21.65,10.05 21.775,10.175 22.175,10.175 22.325,10.325 24.375,10.325 24.625,10.075 24.625,8.425 24.85,8.2 25.3,8.2 25.5,8.4 25.5,8.944 25.275,9.169 25.275,9.806 25.5,10.031 25.5,10.575 24.675,11.4 24.47,11.4 v2(24.435,11.435)
FT_D16: IC7.B18 IC8.60 | length 16.5
  Top w0.2: IC8.60@19.525,12.885 v1(20.175,12.885)
  L4 w0.1: v1(20.175,12.885) 19.852,12.885 19.046,12.079 18.809,12.079 18.438,12.45 15.3,12.45 15.125,12.625 15.125,12.95 15.45,13.275 15.45,13.575 15.8,13.925 17.367,13.925 17.767,13.525 19.075,13.525 19.625,14.075 20.4,14.075 20.575,13.9 20.575,13.5 21.95,12.125 22.745,12.125 v2(22.935,11.935)
FT_D17: IC7.C18 IC8.61 | length 16.2
  Top w0.1: v2(22.385,12.435) IC7.C18@22.935,12.435
  Top w0.2: v1(18.425,14.45) 18.425,13.475 18.615,13.285 18.875,13.285 IC8.61@19.525,13.285
  L4 w0.1: v1(18.425,14.45) 17.95,14.45 17.325,15.075 16.975,15.075 16.775,14.875 16.45,14.875 16.25,15.075 15.6,15.075 15.425,14.9 15.425,14.3 15.6,14.125 17.45,14.125 17.85,13.725 18.992,13.725 19.575,14.308 19.575,14.6 19.91,14.935 20.39,14.935 20.575,14.75 20.575,14.325 20.825,14.075 20.825,13.625 22.015,12.435 v2(22.385,12.435)
FT_D18: IC7.A17 IC8.62 | length 16.1
  Top w0.2: IC8.62@19.525,13.685 v1(20.175,13.685)
  L4 w0.1: v1(20.175,13.685) 20.156,13.685 19.966,13.875 19.708,13.875 19.158,13.325 17.631,13.325 17.381,13.075 17.05,13.075 16.825,13.3 16.575,13.3 16.36,13.085 15.585,13.085 15.475,12.975 15.475,12.75 15.575,12.65 17.65,12.65 17.825,12.825 18.05,12.825 18.225,12.65 18.5,12.65 18.725,12.875 19.559,12.875 19.919,13.235 20.44,13.235 20.6,13.075 20.6,12.575 20.825,12.35 21.325,12.35 21.512,12.163 21.512,11.712 21.625,11.6 21.9,11.6 22.175,11.875 22.45,11.875 22.725,11.6 23.27,11.6 v2(23.435,11.435)
FT_D19: IC7.K18 IC8.63 | length 13.6
  Top w0.1: v2(21.835,15.935) IC7.K18@22.935,15.935
  Top w0.2: v1@18.875,14.085 IC8.63@19.525,14.085
  L6 w0.1: v1(18.85,14.085) 19.225,14.46 19.225,15.825 18.975,16.075 18.288,16.075 18.15,16.213 18.15,16.675 18.31,16.835 19.01,16.835 19.225,17.05 19.225,17.8 19.5,18.075 20.35,18.075 20.525,18.25 20.525,18.857 20.718,19.05 20.875,19.05 20.975,18.95 20.975,18.6 21.75,17.825 21.75,17.575 21.5,17.325 21.5,16.775 21.835,16.44 v2(21.835,15.935)
FT_D20: IC7.C15 IC8.64 | length 15.2
  Top w0.2: IC8.64@19.525,14.485 v1(20.175,14.485)
  L6 w0.1: v1(20.175,14.485) 20.175,14.184 19.05,13.059 18.85,13.059 18.506,12.716 18.506,12.381 18.775,12.113 18.775,11.7 18.9,11.575 19.15,11.575 19.475,11.25 20.025,11.25 20.45,11.675 21.35,11.675 21.525,11.85 21.525,12.1 21.175,12.45 21.175,13.3 21.525,13.65 23.3,13.65 23.625,13.975 24.25,13.975 24.7,13.525 24.875,13.525 25.3,13.1 25.3,12.775 24.96,12.435 v2(24.435,12.435)
FT_D21: IC7.L18 IC8.65 | length 14.9
  Top w0.1: v2(22.385,16.435) IC7.L18@22.935,16.435
  Top w0.2: v1(18.75,15.135) 19,14.885 IC8.65@19.525,14.885
  L6 w0.1: v1(18.75,15.135) 18.165,15.135 17.883,15.417 17.883,15.853 17.56,16.175 16.775,16.175 16.575,16.375 16.575,17.125 16.775,17.325 17.825,17.325 18.025,17.525 18.025,17.975 17.825,18.175 17.825,18.355 17.995,18.525 19.525,18.525 19.925,18.925 20.31,18.925 20.71,19.325 21.35,19.325 21.525,19.15 21.525,18.35 22.025,17.85 22.025,17.175 22.385,16.815 v2(22.385,16.435)
FT_D22: IC7.F18 IC8.66 | length 15.5
  Top w0.1: v2(21.835,13.935) IC7.F18@22.935,13.935
  Top w0.2: IC8.66@19.525,15.285 v1(20.175,15.285)
  L6 w0.1: v1(20.175,15.285) 19.825,15.635 19.825,16.35 20.01,16.535 20.69,16.535 20.9,16.325 20.9,14.9 20.55,14.55 20.55,13.565 20.26,13.275 19.925,13.275 19.75,13.1 19.75,12.815 20.04,12.525 20.625,12.525 20.95,12.85 20.95,13.475 21.175,13.7 21.175,14.15 21.55,14.525 21.9,14.525 22.45,15.075 22.75,15.075 23.05,14.775 23.05,14.185 22.8,13.935 v2(21.835,13.935)
FT_D23: IC7.C16 IC8.67 | length 16.1
  Top w0.2: v1@18.875,15.685 IC8.67@19.525,15.685
  L4 w0.1: v1(18.85,15.685) 18.36,16.175 16,16.175 15.718,15.893 15.718,15.482 15.925,15.275 17.475,15.275 17.95,14.8 18.59,14.8 18.855,14.535 19.135,14.535 19.575,14.975 19.575,15.2 20.06,15.685 20.365,15.685 20.825,15.225 20.825,14.5 21.075,14.25 21.075,13.775 22.05,12.8 22.575,12.8 23.3,12.075 23.575,12.075 v2(23.935,12.435)
FT_D24: IC7.G16 IC8.69 | length 16.4
  Top w0.2: v1@18.875,16.485 IC8.69@19.525,16.485
  L4 w0.1: v1(18.85,16.485) 18.3,17.035 18.3,17.55 18.45,17.7 19.125,17.7 19.225,17.8 19.225,19.575 19.425,19.775 19.65,19.775 19.825,19.6 19.825,18.95 20,18.775 20.475,18.775 20.625,18.925 20.625,19.325 21.1,19.8 22.225,19.8 22.4,19.625 22.4,18.125 22.7,17.825 22.7,16.925 22.925,16.7 22.925,14.4 23.325,14 23.7,14 23.935,14.235 v2(23.935,14.435)
FT_D25: IC7.D13 IC8.70 | length 16
  Top w0.1: v2(25.015,12.935) IC7.D13@25.435,12.935 IC7.D13@25.425,12.925
  Top w0.2: IC8.70@19.525,16.885 v1(20.175,16.885)
  L4 w0.1: v1(20.175,16.885) 20.425,16.635 20.786,16.635 21.1,16.949 21.1,17.43 21.3,17.63 21.3,18.193 21.1,18.393 21.1,19 21.375,19.275 21.85,19.275 22,19.125 22,18.05 21.8,17.85 21.8,17.4 21.5,17.1 21.5,16.775 21.7,16.575 21.7,16.4 21.5,16.2 21.5,15.838 21.325,15.663 21.325,15.288 21.5,15.112 21.5,14.6 21.7,14.4 21.925,14.4 22.15,14.175 22.15,13.475 22.325,13.3 22.6,13.3 22.875,13.575 23.55,13.575 23.825,13.3 24.075,13.3 24.475,13.7 24.7,13.7 25.015,13.385 v2(25.015,12.935)
FT_D26: IC7.G18 IC8.71 | length 16.2
  Top w0.1: v2(22.385,14.435) IC7.G18@22.935,14.435
  Top w0.2: v1@18.875,17.285 IC8.71@19.525,17.285
  L4 w0.1: v1(18.85,17.285) 18.85,16.975 18.99,16.835 18.995,16.835 19.155,16.675 19.575,16.675 19.8,16.9 19.8,17.263 19.525,17.538 19.525,18.375 19.65,18.5 20.225,18.5 20.375,18.35 20.375,17.235 20.525,17.085 20.76,17.085 20.9,17.225 20.9,19.2 21.275,19.575 21.975,19.575 22.2,19.35 22.2,17.775 22.025,17.6 22.025,17.275 22.724,16.576 22.724,16.299 22.05,15.625 22.05,15.2 22.225,15.025 22.225,14.595 v2(22.385,14.435)
FT_D27: IC7.F16 IC8.72 | length 17.1
  Top w0.1: IC8.72@19.525,17.685 19.887,17.685 20.125,17.923 20.125,17.925 20.4,18.2 20.95,18.2 21.25,18.5 21.25,19.75 20.95,20.05 20.075,20.05 19.9,20.225 19.9,20.45 20.025,20.575 20.806,20.575 20.981,20.4 21.544,20.4 21.784,20.159 21.784,19.781 22.025,19.541 22.025,19.163 21.85,18.988 21.85,18.663 22.025,18.488 22.025,17.9 21.3,17.175 21.3,13.708 21.558,13.45 22.075,13.45 23.45,13.45 IC7.F16@23.935,13.935
FT_D28: IC7.C17 IC8.73 | length 16.1
  Top w0.2: v1@18.875,18.085 IC8.73@19.525,18.085
  L4 w0.1: v1(18.85,18.085) 17.715,18.085 17.45,18.35 15.875,18.35 15.575,18.05 15.575,17.525 15.85,17.25 17.4,17.25 17.675,16.975 17.675,16.65 17.838,16.488 18.337,16.488 18.775,16.05 19.375,16.05 19.76,16.435 20.32,16.435 21.075,15.68 21.075,14.65 21.325,14.4 21.325,13.875 22.125,13.075 22.795,13.075 v2(23.435,12.435)
FT_D29: IC7.F17 IC8.74 | length 16.7
  Top w0.1: IC8.74@19.525,18.485 20.885,18.485 21.025,18.625 21.025,18.875 20.875,19.025 20.875,19.281 21.025,19.431 21.025,19.65 20.825,19.85 19.75,19.85 19.575,20.025 19.575,20.675 19.75,20.85 20.9,20.85 21.075,20.675 21.6,20.675 21.974,20.301 21.974,19.976 22.272,19.678 22.272,17.847 21.5,17.075 21.5,13.791 21.641,13.65 23.15,13.65 IC7.F17@23.435,13.935
FT_D30: IC7.K15 IC8.75 | length 16.7
  Top w0.2: v1@18.875,18.885 IC8.75@19.525,18.885
  L4 w0.1: v1(18.85,18.885) 18.85,18.625 18.6,18.375 18,18.375 17.725,18.65 17.725,20 18.225,20.5 18.225,21.05 18.425,21.25 21.6,21.25 21.975,20.875 23.35,20.875 24.1,20.125 24.1,19.75 25.05,18.8 25.05,18.05 24.55,17.55 24.55,17.25 24.925,16.875 24.925,16.175 24.76,16.01 v2(24.31,16.01)
FT_D31: IC7.K17 IC8.76 | length 16.8
  Top w0.2: IC8.76@19.525,19.285 v1(20.175,19.285)
  L4 w0.1: v1(20.175,19.285) 20.175,19.6 19.7,20.075 19.3,20.075 18.875,19.65 18.4,19.65 18.2,19.85 18.2,20.15 18.5,20.45 18.95,20.45 19.425,20.925 20.1,20.925 20.3,20.725 20.3,20.175 20.475,20 20.89,20 21.05,20.16 21.05,20.575 21.15,20.675 21.575,20.675 21.695,20.555 21.695,20.23 21.9,20.025 22.125,20.025 22.375,20.275 22.375,20.55 22.5,20.675 23.212,20.675 23.35,20.537 ; 23.225,20.662 23.475,20.412 23.475,20.025 22.6,19.15 22.6,18.275 22.925,17.95 22.925,16.975 23.125,16.775 23.125,16.195 v2(23.31,16.01)
FT_OEN: IC7.L16 IC8.13 | length 15.1
  Top w0.2: IC8.13@13.825,20.185 v1(13.825,20.835)
  Bottom w0.1: v1(13.825,20.835) 14.69,21.7 16.158,21.7 16.358,21.5 19.233,21.5 21.125,19.608 21.125,17 21.5,16.625 22,16.625 22.175,16.8 22.725,16.8 22.875,16.65 23.77,16.65 v2(24.06,16.36)
FT_RDN: IC7.H15 IC8.12 | length 19.5
  Top w0.2: v1(14.225,19.535) IC8.12@14.225,20.185
  L6 w0.1: v1(14.225,19.535) 14.225,21.05 14.875,21.7 20.26,21.7 20.76,22.2 21.1,22.2 21.575,21.725 22.558,21.725 22.975,21.308 22.975,20.925 24.825,19.075 24.825,18.76 25.1,18.485 25.1,18.075 24.575,17.55 24.575,17.225 24.85,16.95 24.85,16.1 24.4,15.65 24.4,15.1 v2(24.31,15.01)
FT_RESETN: C132.1 IC7.M17 IC8.15 R56.1 | length 28.2
  Top w0.2: IC8.15@13.025,20.185 v1(13.025,20.835)
  L4 w0.1: v1(5.45,24.35) 6.84,22.96 10.275,22.96 12.4,20.835 v1(13.025,20.835)
  Bottom w0.1: v1(13.025,20.835) 14.09,21.9 16.241,21.9 16.441,21.7 19.316,21.7 19.433,21.583 21.325,19.691 21.325,17.725 21.575,17.475 21.95,17.475 22.415,17.01 v2(23.31,17.01)
  Bottom w0.3: C132.1@5.375,21.325 6.05,21.325 6.5,21.775 6.5,22.75 5.825,23.425 R56.1@5.375,23.425 5.45,23.5 v1(5.45,24.35)
FT_RXFN: IC7.H16 IC8.9 | length 14.2
  Top w0.2: IC8.9@15.425,20.185 v1(15.425,20.835)
  Bottom w0.1: v1(15.425,20.835) 16.285,19.975 17.125,19.975 17.575,19.525 18.925,19.525 19.225,19.225 19.225,15.525 19.9,14.85 21.225,14.85 21.55,14.525 21.9,14.525 22.175,14.8 22.575,14.8 22.7,14.675 23.675,14.675 v2(23.935,14.935)
FT_SIWUN: IC8.10 R54.1 | length 1.3
  Top w0.2: v1(15.025,19.535) IC8.10@15.025,20.185
  Bottom w0.3: R54.1@14.975,20.175 15.025,20.125 v1(15.025,19.535)
FT_TXEN: IC7.M16 IC8.8 | length 15.6
  Top w0.2: v1(15.825,19.535) IC8.8@15.825,20.185
  L6 w0.1: v1(15.825,19.535) 16.031,19.741 16.241,19.741 16.65,20.15 16.65,21.05 16.9,21.3 17.3,21.3 17.412,21.188 17.988,21.188 18.1,21.3 18.5,21.3 18.612,21.188 19.063,21.188 19.175,21.3 19.45,21.3 19.775,20.975 20,20.975 20.325,21.3 21.625,21.3 22.1,20.825 22.1,20.575 21.825,20.3 21.825,20.05 22.3,19.575 23.075,19.575 23.175,19.475 23.175,19.075 23.05,18.95 22.46,18.95 22.31,18.8 22.31,18.51 23.295,17.525 23.825,17.525 24,17.35 24,17.2 v2(23.81,17.01)
FT_VBUS: IC8.37 R57.1 R58.2 | length 3.1
  Top w0.2: v1(8.775,11.875) 9.385,12.485 IC8.37@10.525,12.485
  Bottom w0.6: R57.1@8.775,11.325 R58.2@8.775,12.425
FT_WAKEUPN: IC7.G15 IC8.16 R55.1 | length 23.5
  Top w0.2: v1(12.625,19.535) IC8.16@12.625,20.185
  L6 w0.1: v1(12.625,19.535) 12.625,19.625 13.4,20.4 13.4,20.925 14.4,21.925 17.275,21.925 17.875,22.525 21.225,22.525 21.75,22 22.625,22 23.275,21.35 23.275,21.051 23.601,20.725 24.512,20.725 25.05,20.187 25.05,18.85 25.8,18.1 25.8,17.775 25.075,17.05 25.075,16.025 24.625,15.575 24.625,14.625 v2(24.435,14.435)
  Bottom w0.3: R55.1@11.95,20.175 11.95,20.046 12.461,19.535 v1(12.625,19.535)
FT_WRN: IC7.J16 IC8.11 | length 14.6
  Top w0.2: IC8.11@14.625,20.185 v1(14.625,20.835)
  Bottom w0.1: v1(14.625,20.835) 14.625,21.15 14.975,21.5 16.075,21.5 16.275,21.3 19.15,21.3 20.925,19.525 20.925,16.7 21.225,16.4 21.875,16.4 22.275,16 22.7,16 23.015,15.685 23.685,15.685 v2(23.935,15.435)
FT_XI: C130.1 IC8.21 XT1.3 | length 7
  Top w0.2: IC8.21@10.525,18.885 11.175,18.885 v1(11.275,18.985)
  Top w0.4: C130.1@8.775,20.95 v1(9.275,20.95)
  L6 w0.1: v1@9.275,21.029 9.194,21.11 ccw(c8.916,20.832) 8.916,21.225 ccw(c8.916,20.884) 8.675,21.125 ccw(c9.52,20.28) 8.325,20.28 8.325,19.76 ccw(c9.3,19.76) 9.3,18.785 10.9,18.785 ccw(c10.9,19.208) 11.199,18.909 v1(11.275,18.985)